# Altium PCB nexusqfp.PcbDoc (part 1 of 2)
Units mm, origin at the board's own origin, x right, y up, seen from the top; angles counter-clockwise.
Board outline 100 x 100 mm, 2 copper layers (Top Layer, Bottom Layer); 128 components, 155 nets, 699 pads, 158 vias.
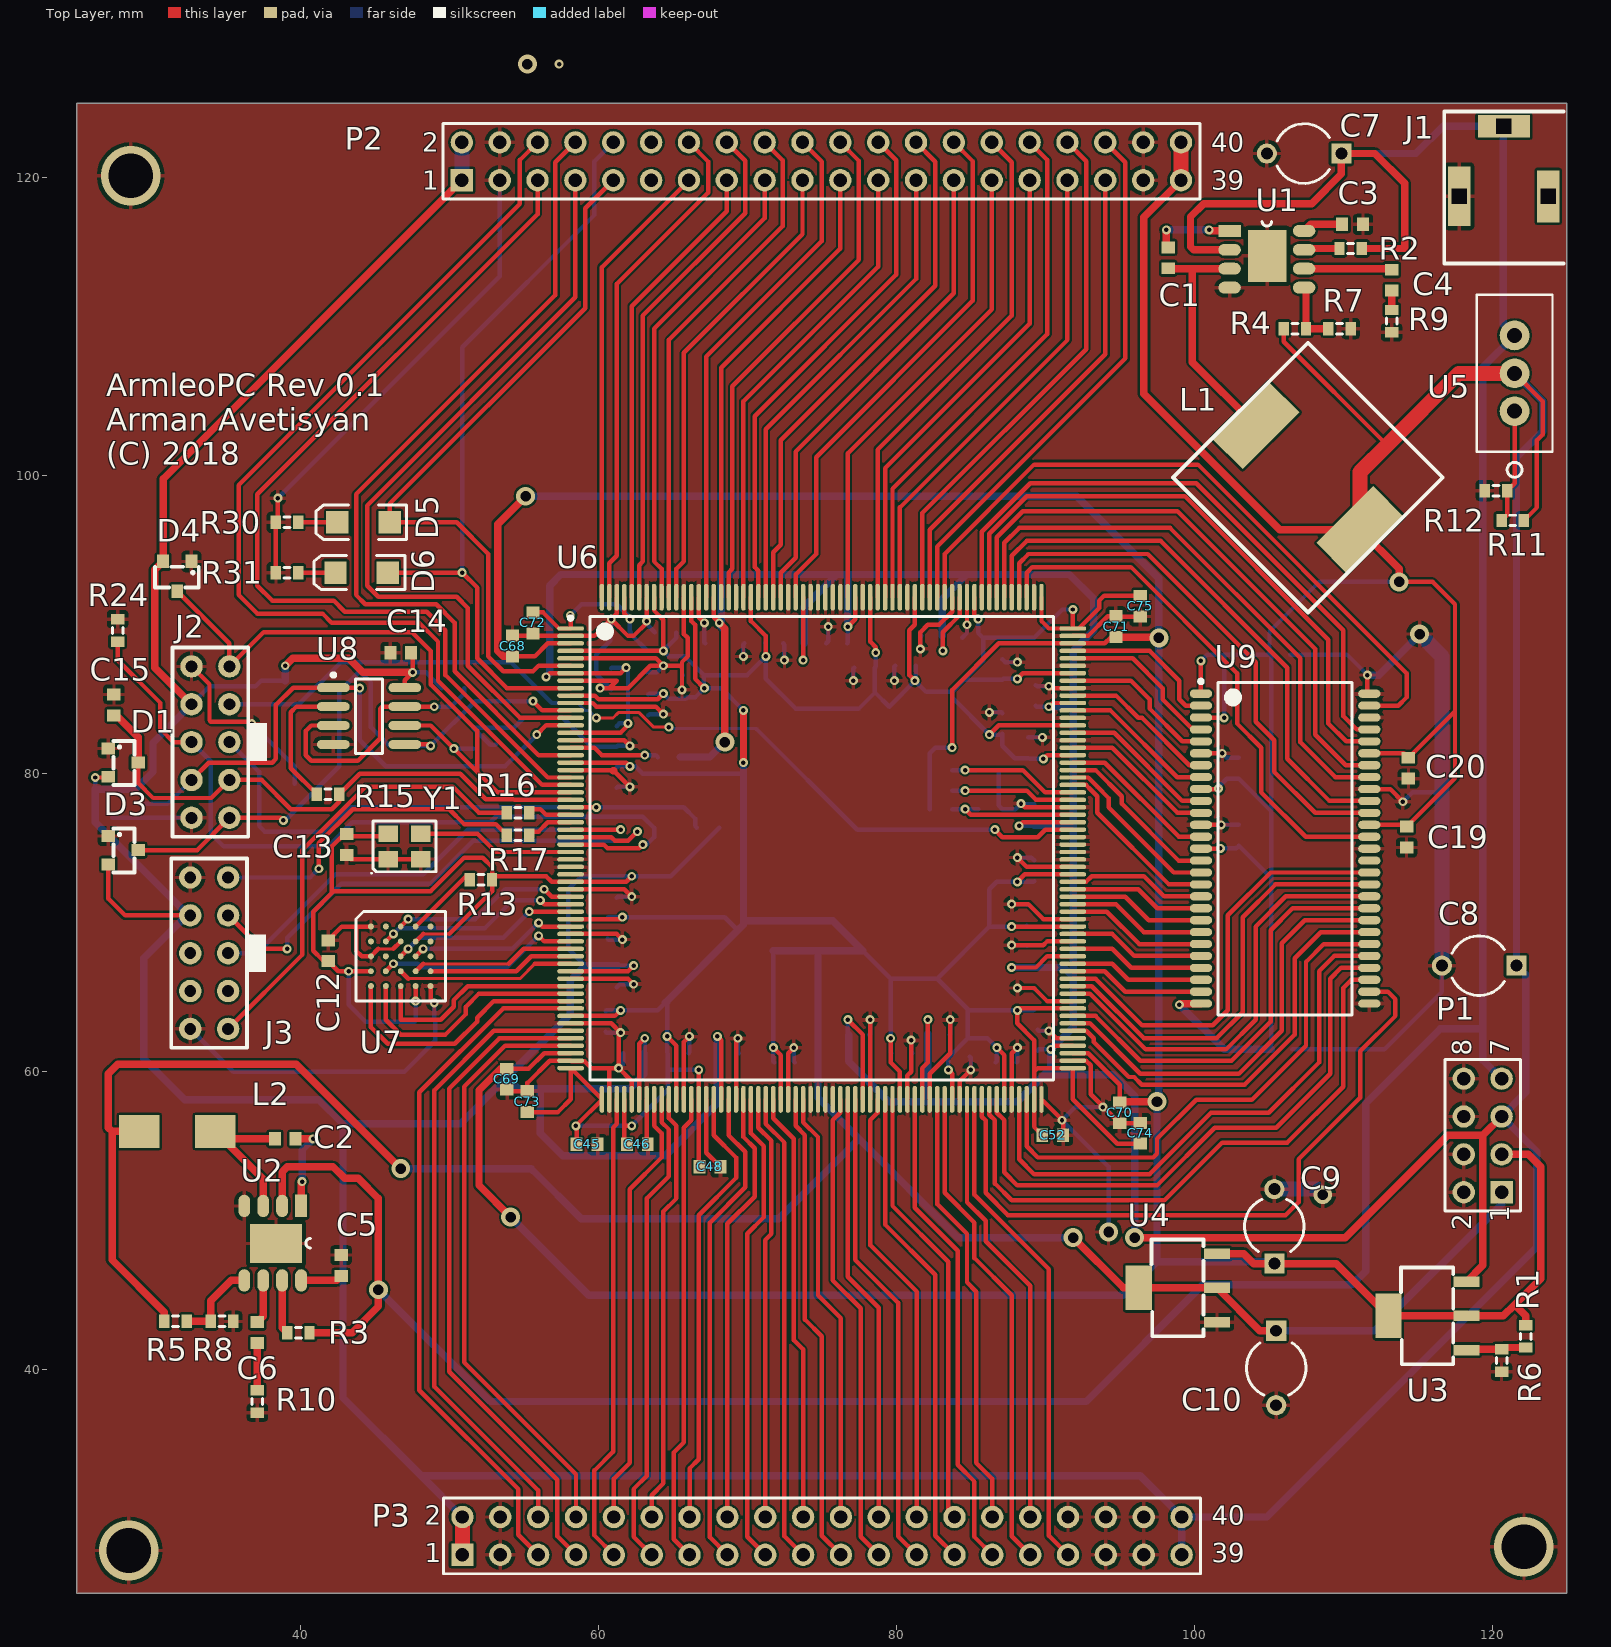
[diagram p0: Top Layer view]
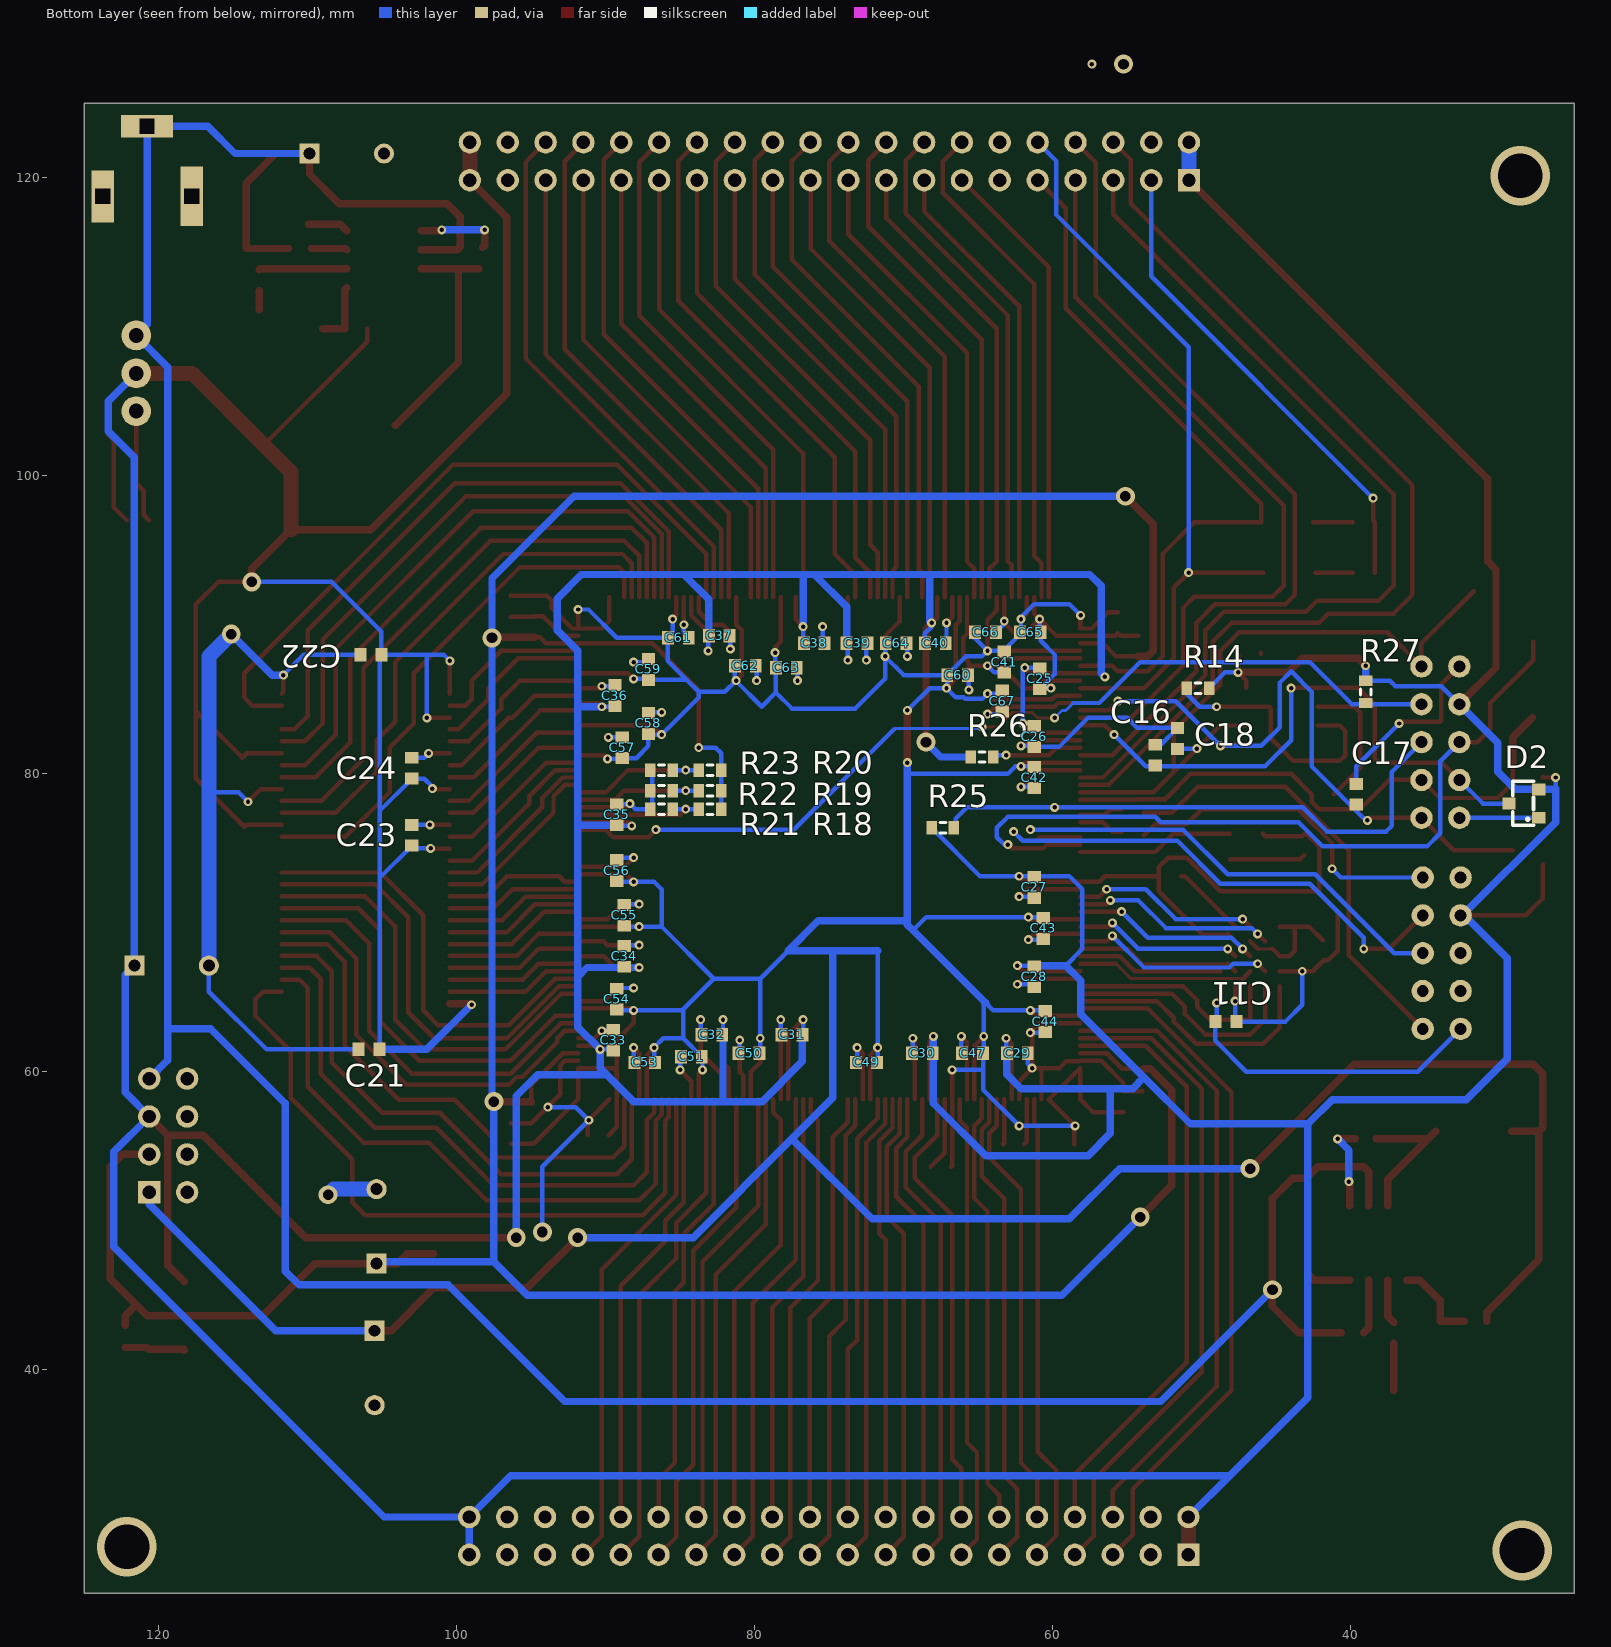
[diagram p1: Bottom Layer view, seen from below]

## Layer stack, top to bottom
Top Solder: solder mask 0.0102, Solder Resist, Dk 3.5
Top Layer: signal copper 0.0356
Dielectric 1: dielectric 0.32, FR-4, Dk 4.8
Bottom Layer: signal copper 0.0356
Bottom Solder: solder mask 0.0102, Solder Resist, Dk 3.5

## Board outline
25,25 125,25 125,125 25,125

## Design rules (kind name [scope] priority, off if disabled: settings)
Clearance [All] p1: gap=0.152 ignorepadtopadclearanceinfootprint=FALSE
HoleSize [All] p1: absolutevalues=TRUE maxlimit=6.3 minlimit=0.3 maxpercent=80.000 minpercent=20.000
MinimumSolderMaskSliver [All] p1: minsoldermaskwidth=0.152
PolygonConnect [All] p1: connectstyle=Relief reliefconductorwidth=0.254 reliefentries=4 polygonreliefangle="90 Angle" airgapwidth=0.254
RoomDefinition nexusqfp [InComponentClass('nexusqfp')] p1: confinementstyle=ConfineIn formatcopy=TRUE lockcomponents=FALSE outline 12.75,19.5 134.5,19.5 134.5,131 12.75,131
RoutingVias [All] p1: holewidth=0.3 width=0.6 viastyle="Through Hole" minholewidth=0.3 minwidth=0.6 maxholewidth=6.3 maxwidth=6.3
SolderMaskExpansion [All] p1: expansion=0.51
Width [All] p1: maxlimit=6.3 minlimit=0.15 preferedwidth=0.3
28 further rules are at their usual default settings.

## Components (designator, comment, footprint, x,y, rotation, side; value= is the part's Value field where it differs from the comment)
C1 "Cap Semi" 1608[0603] 98.25,114.625 r90 top value=10nF
C2 "Cap Semi" 1608[0603] 39,55.5 r0 top value=10nF
C3 "Cap Semi" 1608[0603] 110.625,116.875 r180 top value=100pF
C4 "Cap Semi" 1608[0603] 113.25,113.125 r90 top value=6.8nF
C5 "Cap Semi" 1608[0603] 42.75,47 r270 top value=100pF
C6 "Cap Semi" 1608[0603] 37.125,42.5 r90 top value=6.8nF
C7 "Cap2" CAPR5-4X5 107.375,121.625 r180 top value=47uF
C8 "Cap2" CAPR5-4X5 119.125,67.125 r180 top value=47uF
C9 "Cap2" CAPR5-4X5 105.375,49.625 r90 top value=47uF
C10 "Cap2" CAPR5-4X5 105.5,40.125 r270 top value=47uF
C11 "Cap Semi" 1608[0603] 48.375,63.375 r180 bottom value=100pF
C12 "Cap Semi" 1608[0603] 41.875,68.125 r270 top value=100pF
C13 "Cap Semi" 1608[0603] 43.125,75.25 r90 top value=100pF
C14 "Cap Semi" 1608[0603] 46.75,88.125 r0 top value=100pF
C15 "" 1608[0603] 27.5,84.625 r90 top value=10pF
C16 "" 1608[0603] 53.125,81.25 r90 bottom value=10pF
C17 "" 1608[0603] 39.625,78.625 r90 bottom value=10pF
C18 "" 1608[0603] 51.625,82.375 r90 bottom value=10pF
C19 "Cap Semi" 1608[0603] 114.25,75.75 r90 top value=100pF
C20 "Cap Semi" 1608[0603] 114.375,80.375 r90 top value=100pF
C21 "Cap Semi" 1608[0603] 105.875,61.5 r180 bottom value=100pF
C22 "Cap Semi" 1608[0603] 105.75,88 r180 bottom value=100pF
C23 "Cap Semi" 1608[0603] 103,75.875 r270 bottom value=100pF
C24 "Cap Semi" 1608[0603] 103,80.375 r270 bottom value=100pF
C25 "Cap Semi" 1608[0603] 60.875,86.375 r90 bottom value=100pF
C26 "Cap Semi" 1608[0603] 61.25,82.5 r90 bottom value=100pF
C27 "Cap Semi" 1608[0603] 61.25,72.375 r90 bottom value=100pF
C28 "Cap Semi" 1608[0603] 61.25,66.375 r90 bottom value=100pF
C29 "Cap Semi" 1608[0603] 62.375,61.25 r0 bottom value=100pF
C30 "Cap Semi" 1608[0603] 68.75,61.25 r180 bottom value=100pF
C31 "Cap Semi" 1608[0603] 77.5,62.5 r180 bottom value=100pF
C32 "Cap Semi" 1608[0603] 82.875,62.5 r180 bottom value=100pF
C33 "Cap Semi" 1608[0603] 89.5,62.125 r270 bottom value=100pF
C34 "Cap Semi" 1608[0603] 88.75,67.75 r270 bottom value=100pF
C35 "Cap Semi" 1608[0603] 89.25,77.25 r270 bottom value=100pF
C36 "Cap Semi" 1608[0603] 89.375,85.25 r270 bottom value=100pF
C37 "Cap Semi" 1608[0603] 82.375,89.25 r0 bottom value=100pF
C38 "Cap Semi" 1608[0603] 76,88.75 r0 bottom value=100pF
C39 "Cap Semi" 1608[0603] 73.125,88.75 r0 bottom value=100pF
C40 "Cap Semi" 1608[0603] 67.875,88.75 r0 bottom value=100pF
C41 "Cap Semi" 1608[0603] 63.25,87.5 r90 bottom value=100pF
C42 "Cap Semi" 1608[0603] 61.25,79.75 r90 bottom value=100pF
C43 "Cap Semi" 1608[0603] 60.625,69.625 r90 bottom value=100pF
C44 "Cap Semi" 1608[0603] 60.5,63.375 r90 bottom value=100pF
C45 "Cap Semi" 1608[0603] 59.25,55.125 r180 top value=100pF
C46 "Cap Semi" 1608[0603] 62.625,55.125 r180 top value=100pF
C47 "Cap Semi" 1608[0603] 65.375,61.25 r180 bottom value=100pF
C48 "Cap Semi" 1608[0603] 67.5,53.625 r180 top value=100pF
C49 "Cap Semi" 1608[0603] 72.5,60.625 r180 bottom value=100pF
C50 "Cap Semi" 1608[0603] 80.375,61.25 r180 bottom value=100pF
C51 "Cap Semi" 1608[0603] 84.25,61 r180 bottom value=100pF
C52 "Cap Semi" 1608[0603] 90.5,55.75 r180 top value=100pF
C53 "Cap Semi" 1608[0603] 87.375,60.625 r180 bottom value=100pF
C54 "Cap Semi" 1608[0603] 89.25,64.875 r270 bottom value=100pF
C55 "Cap Semi" 1608[0603] 88.75,70.5 r270 bottom value=100pF
C56 "Cap Semi" 1608[0603] 89.25,73.5 r270 bottom value=100pF
C57 "Cap Semi" 1608[0603] 88.875,81.75 r270 bottom value=100pF
C58 "Cap Semi" 1608[0603] 87.125,83.375 r270 bottom value=100pF
C59 "Cap Semi" 1608[0603] 87.125,87 r270 bottom value=100pF
C60 "Cap Semi" 1608[0603] 66.375,86.625 r0 bottom value=100pF
C61 "Cap Semi" 1608[0603] 85.125,89.125 r0 bottom value=100pF
C62 "Cap Semi" 1608[0603] 80.625,87.25 r0 bottom value=100pF
C63 "Cap Semi" 1608[0603] 77.875,87.125 r0 bottom value=100pF
C64 "Cap Semi" 1608[0603] 70.5,88.75 r0 bottom value=100pF
C65 "Cap Semi" 1608[0603] 61.5,89.5 r0 bottom value=100pF
C66 "Cap Semi" 1608[0603] 64.5,89.5 r0 bottom value=100pF
C67 "Cap Semi" 1608[0603] 63.375,84.875 r90 bottom value=100pF
C68 "Cap Semi" 1608[0603] 54.25,88.575 r270 top value=100pF
C69 "Cap Semi" 1608[0603] 53.875,59.5 r90 top value=100pF
C70 "Cap Semi" 1608[0603] 95,57.25 r90 top value=100pF
C71 "Cap Semi" 1608[0603] 94.75,89.875 r270 top value=100pF
C72 "Cap Semi" 1608[0603] 55.625,90.125 r90 top value=100pF
C73 "Cap Semi" 1608[0603] 55.25,58 r270 top value=100pF
C74 "Cap Semi" 1608[0603] 96.375,55.875 r270 top value=100pF
C75 "Cap Semi" 1608[0603] 96.375,91.25 r90 top value=100pF
D1 "Double Diode" SOT-23 29.125,80.75 r270 top
D2 "Double Diode" SOT-23 29.375,78 r90 bottom
D3 "Double Diode" SOT-23 29.125,74.875 r270 top
D4 "Double Diode" SOT-23 31.75,92.25 r180 top
D5 "LED2" 3.2X1.6X1.1 44.25,96.875 r180 top
D6 "LED2" 3.2X1.6X1.1 44.125,93.501 r180 top
J1 "PowerJack" PJ-002A 117.781,118.75 r0 top
J2 "2X5 2.54mm Conn with polarity" "2X5 with polarity" 32.71,77.045 r0 top
J3 "2X5 2.54mm Conn with polarity" "2X5 with polarity" 32.625,62.88 r0 top
L1 "Inductor" "74477110 Inductor" 107.625,99.875 r45 top value=10uH
L2 "Inductor" 744311330 31.75,56 r0 top value=10uH
P1 "Header 4X2" HDR2X4 120.625,51.92 r90 top
P2 "Header 20X2" HDR2X20 50.85,119.835 r0 top
P3 "Header 20X2" HDR2X20 50.89,27.585 r0 top
R1 "Res3" J1-0603 122.25,42.25 r90 top value=1K
R2 "Res3" J1-0603 110.5,115.25 r0 top value=100K
R3 "Res3" J1-0603 39.875,42.5 r0 top value=100K
R4 "Res3" J1-0603 106.75,109.875 r0 top value=26.1K
R5 "Res3" J1-0603 31.625,43.25 r0 top value=3K
R6 "Res3" J1-0603 120.625,40.625 r90 top value=1K
R7 "Res3" J1-0603 109.75,109.875 r180 top value=10K
R8 "Res3" J1-0603 34.75,43.25 r180 top value=10K
R9 "Res3" J1-0603 113.25,110.375 r90 top value=6.8K
R10 "Res3" J1-0603 37.125,37.875 r90 top value=3.24K
R11 "Res3" J1-0603 121.375,97 r0 top value=1640
R12 "Res3" J1-0603 120.25,99 r0 top value=1K
R13 "Res3" J1-0603 52.125,72.875 r0 top value=10K
R14 "Res3" J1-0603 50.25,85.75 r180 bottom value=1K
R15 "Res3" J1-0603 41.875,78.625 r0 top value=27
R16 "Res3" J1-0603 54.625,77.375 r0 top value=27
R17 "Res3" J1-0603 54.625,75.875 r0 top value=27
R18 "Res3" J1-0603 83,77.625 r180 bottom value=0
R19 "Res3" J1-0603 83,78.875 r180 bottom value=0
R20 "Res3" J1-0603 83,80.25 r180 bottom value=0
R21 "Res3" J1-0603 86.25,77.625 r180 bottom value=0
R22 "Res3" J1-0603 86.25,78.875 r180 bottom value=0
R23 "Res3" J1-0603 86.25,80.25 r180 bottom value=0
R24 "Res3" J1-0603 27.75,89.625 r90 top value=10K
R25 "Res3" J1-0603 67.375,76.375 r180 bottom value=10K
R26 "Res3" J1-0603 64.75,81.125 r180 bottom value=10K
R27 "Res3" J1-0603 39,85.5 r270 bottom value=10K
R30 "Res3" J1-0603 39.125,96.875 r0 top value=500
R31 "Res3" J1-0603 39.125,93.5 r0 top value=500
U1 "AP6503" SO-8EP 102.375,116.435 r0 top
U2 "AP6503" SO-8EP 40.06,51 r270 top
U3 "AMS1117-ADJ" SOT-223 115.625,43.625 r90 top
U4 "AMS1117-1.2V" SOT-223 98.875,45.5 r90 top
U5 "LM317TG" TO-220AB 121.5,109.415 r90 top value=Value
U6 "EP3C40Q240C8N" PQFP240_N 75,75 r0 top
U7 "HyperRAM" "BGA5x5 1mm" 46.75,67.75 r0 top
U8 "M25P16-VMN3PB" MICT-MN-8_N 44.625,83.875 r0 top
U9 "MT48LC16M16A2P-6A" MICT-P-54_N 106.1,74.975 r0 top
Y1 "Abracon XO ASE" "ABRACON ASE" 47,75.125 r0 top

## Footprints (in the part's own frame and the unit in brackets; to place one, negate y for a bottom-side part, rotate by r counter-clockwise, add the part's x,y. Pads: shape width x height; smd on the part's side, far side on the other; paste and mask are expansions set on the pad)
"2X5 with polarity" [mm]
  round 1.5 hole 0.8: 1(2.54,10.16) 2(0,10.16) 3(2.54,7.62) 4(0,7.62) 5(2.54,5.08) 6(0,5.08) 7(2.54,2.54) 8(0,2.54) 9(2.54,0) 10(0,0)
  silkscreen extent -1.27,-1.27 5.08,11.43
3.2X1.6X1.1 [mm] "SMT LED; 2 Flat Leads"
  rect 1.5x1.5 smd: 1(-1.75,0) 2(1.75,0)
  silkscreen extent -2.9,-1.15 3.2,1.15
1608[0603] [mm] "Chip Capacitor, Body 1.6x0.8mm, IPC High Density"
  rect 0.8x0.9 smd: 1(-0.7,0) 2(0.7,0)
  body extent -0.87,-0.48 0.87,0.48, height 1.3
"74477110 Inductor" [mm]
  rect 5.4x2.9 smd: 1(0,4.95) 2(0,-4.95)
  silkscreen extent -6.4,-6.4 6.4,6.4
744311330 [mm]
  rect 2.7x2.2 smd: 1(2.55,0) 2(-2.55,0)
"ABRACON ASE" [mm] "Crystal, 4-Leads, Body 2.50x3.20mm, Pitch 2.20mm, IPC Medium Density"
  rect 1.3x1.1 smd: 1(-1.1,-0.85) 2(1.1,-0.85) 3(1.1,0.85) 4(-1.1,0.85)
  silkscreen extent -2.25,-1.85 2.1,1.7, body extent -1.62,-1.27 1.63,1.28, height 1.2
"BGA5x5 1mm" [mm]
  round 0.4 smd: A1(-2,2) A2(-1,2) A3(0,2) A4(1,2) A5(2,2) B1(-2,1) B2(-1,1) B3(0,1) B4(1,1) B5(2,1) C1(-2,0) C2(-1,0) C3(0,0) C4(1,0) C5(2,0) D1(-2,-1) D2(-1,-1) D3(0,-1) D4(1,-1) D5(2,-1) E1(-2,-2) E2(-1,-2) E3(0,-2) E4(1,-2) E5(2,-2)
  silkscreen extent -3,-3 3,3
CAPR5-4X5 [mm] "Capacitor; 2 Leads"
  rect 1.35x1.35 hole 0.8: 1(-2.5,0)
  round 1.35 hole 0.8: 2(2.5,0)
  silkscreen extent -1.69,-2 1.82,2
HDR2X4 [mm] "Connector; Header; 4x2 Position"
  rect 1.5x1.5 hole 0.9: 1(0,0)
  round 1.5 hole 0.9: 2(0,2.54) 3(2.54,0) 4(2.54,2.54) 5(5.08,0) 6(5.08,2.54) 7(7.62,0) 8(7.62,2.54)
  silkscreen extent -1.27,-1.27 8.89,3.81
HDR2X20 [mm] "Connector; Header; 20x2 Position"
  rect 1.5x1.5 hole 0.9: 1(0,0)
  round 1.5 hole 0.9: 2(0,2.54) 3(2.54,0) 4(2.54,2.54) 5(5.08,0) 6(5.08,2.54) 7(7.62,0) 8(7.62,2.54) 9(10.16,0) 10(10.16,2.54) 11(12.7,0) 12(12.7,2.54) 13(15.24,0) 14(15.24,2.54) 15(17.78,0) 16(17.78,2.54) 17(20.32,0) 18(20.32,2.54) 19(22.86,0) 20(22.86,2.54) 21(25.4,0) 22(25.4,2.54) 23(27.94,0) 24(27.94,2.54) 25(30.48,0) 26(30.48,2.54) 27(33.02,0) 28(33.02,2.54) 29(35.56,0) 30(35.56,2.54) 31(38.1,0) 32(38.1,2.54) 33(40.64,0) 34(40.64,2.54) 35(43.18,0) 36(43.18,2.54) 37(45.72,0) 38(45.72,2.54) 39(48.26,0) 40(48.26,2.54)
  silkscreen extent -1.27,-1.27 49.53,3.81
J1-0603 [mm] "Chip Resistor, Body 1.6x0.8mm, IPC High Density"
  rect 0.7x0.9 smd: 1(-0.75,0) 2(0.75,0)
  silkscreen extent -0.2,-0.35 0.2,0.35, body extent -0.85,-0.48 0.85,0.48, height 0.9
MICT-MN-8_N [mm] "SOIC, 8-Leads, Body 5x4mm, Pitch 1.27mm, IPC Medium Density"
  oval 2.2x0.6 smd: 1(-2.4,1.905) 2(-2.4,0.635) 3(-2.4,-0.635) 4(-2.4,-1.905) 5(2.4,-1.905) 6(2.4,-0.635) 7(2.4,0.635) 8(2.4,1.905)
  silkscreen extent -2.52,-2.5 0.9,2.88, body extent -2,-2.5 2,2.5, height 0.1
MICT-P-54_N [mm] "SOP, 54-Leads, Body 22.3x10.2mm, Pitch 0.8mm, IPC Medium Density"
  oval 1.5x0.55 smd: 1(-5.65,10.4) 2(-5.65,9.6) 3(-5.65,8.8) 4(-5.65,8) 5(-5.65,7.2) 6(-5.65,6.4) 7(-5.65,5.6) 8(-5.65,4.8) 9(-5.65,4) 10(-5.65,3.2) 11(-5.65,2.4) 12(-5.65,1.6) 13(-5.65,0.8) 14(-5.65,0) 15(-5.65,-0.8) 16(-5.65,-1.6) 17(-5.65,-2.4) 18(-5.65,-3.2) 19(-5.65,-4) 20(-5.65,-4.8) 21(-5.65,-5.6) 22(-5.65,-6.4) 23(-5.65,-7.2) 24(-5.65,-8) 25(-5.65,-8.8) 26(-5.65,-9.6) 27(-5.65,-10.4) 28(5.65,-10.4) 29(5.65,-9.6) 30(5.65,-8.8) 31(5.65,-8) 32(5.65,-7.2) 33(5.65,-6.4) 34(5.65,-5.6) 35(5.65,-4.8) 36(5.65,-4) 37(5.65,-3.2) 38(5.65,-2.4) 39(5.65,-1.6) 40(5.65,-0.8) 41(5.65,0) 42(5.65,0.8) 43(5.65,1.6) 44(5.65,2.4) 45(5.65,3.2) 46(5.65,4) 47(5.65,4.8) 48(5.65,5.6) 49(5.65,6.4) 50(5.65,7.2) 51(5.65,8) 52(5.65,8.8) 53(5.65,9.6) 54(5.65,10.4)
  silkscreen extent -5.77,-11.15 4.5,11.35, body extent -5.1,-11.15 5.1,11.15, height 1.2
PJ-002A [mm]
  rect 1.5x4 hole 1 square: 1(0,0)
  rect 1.5x3.5 hole 1 square: 2(5.969,0)
  rect 3.5x1.5 hole 1 square: 3(3,4.7)
  silkscreen extent -1,-4.5 7,5.7
PQFP240_N [mm] "Shrink QFP, 240-Leads, Body 32x32mm, Pitch 0.5mm, IPC Medium Density"
  oval 1.8x0.3 smd: 1(-16.85,14.75) 2(-16.85,14.25) 3(-16.85,13.75) 4(-16.85,13.25) 5(-16.85,12.75) 6(-16.85,12.25) 7(-16.85,11.75) 8(-16.85,11.25) 9(-16.85,10.75) 10(-16.85,10.25) 11(-16.85,9.75) 12(-16.85,9.25) 13(-16.85,8.75) 14(-16.85,8.25) 15(-16.85,7.75) 16(-16.85,7.25) 17(-16.85,6.75) 18(-16.85,6.25) 19(-16.85,5.75) 20(-16.85,5.25) 21(-16.85,4.75) 22(-16.85,4.25) 23(-16.85,3.75) 24(-16.85,3.25) 25(-16.85,2.75) 26(-16.85,2.25) 27(-16.85,1.75) 28(-16.85,1.25) 29(-16.85,0.75) 30(-16.85,0.25) 31(-16.85,-0.25) 32(-16.85,-0.75) 33(-16.85,-1.25) 34(-16.85,-1.75) 35(-16.85,-2.25) 36(-16.85,-2.75) 37(-16.85,-3.25) 38(-16.85,-3.75) 39(-16.85,-4.25) 40(-16.85,-4.75) 41(-16.85,-5.25) 42(-16.85,-5.75) 43(-16.85,-6.25) 44(-16.85,-6.75) 45(-16.85,-7.25) 46(-16.85,-7.75) 47(-16.85,-8.25) 48(-16.85,-8.75) 49(-16.85,-9.25) 50(-16.85,-9.75) 51(-16.85,-10.25) 52(-16.85,-10.75) 53(-16.85,-11.25) 54(-16.85,-11.75) 55(-16.85,-12.25) 56(-16.85,-12.75) 57(-16.85,-13.25) 58(-16.85,-13.75) 59(-16.85,-14.25) 60(-16.85,-14.75) 121(16.85,-14.75) 122(16.85,-14.25) 123(16.85,-13.75) 124(16.85,-13.25) 125(16.85,-12.75) 126(16.85,-12.25) 127(16.85,-11.75) 128(16.85,-11.25) 129(16.85,-10.75) 130(16.85,-10.25) 131(16.85,-9.75) 132(16.85,-9.25) 133(16.85,-8.75) 134(16.85,-8.25) 135(16.85,-7.75) 136(16.85,-7.25) 137(16.85,-6.75) 138(16.85,-6.25) 139(16.85,-5.75) 140(16.85,-5.25) 141(16.85,-4.75) 142(16.85,-4.25) 143(16.85,-3.75) 144(16.85,-3.25) 145(16.85,-2.75) 146(16.85,-2.25) 147(16.85,-1.75) 148(16.85,-1.25) 149(16.85,-0.75) 150(16.85,-0.25) 151(16.85,0.25) 152(16.85,0.75) 153(16.85,1.25) 154(16.85,1.75) 155(16.85,2.25) 156(16.85,2.75) 157(16.85,3.25) 158(16.85,3.75) 159(16.85,4.25) 160(16.85,4.75) 161(16.85,5.25) 162(16.85,5.75) 163(16.85,6.25) 164(16.85,6.75) 165(16.85,7.25) 166(16.85,7.75) 167(16.85,8.25) 168(16.85,8.75) 169(16.85,9.25) 170(16.85,9.75) 171(16.85,10.25) 172(16.85,10.75) 173(16.85,11.25) 174(16.85,11.75) 175(16.85,12.25) 176(16.85,12.75) 177(16.85,13.25) 178(16.85,13.75) 179(16.85,14.25) 180(16.85,14.75)
  oval 0.3x1.8 smd: 61(-14.75,-16.85) 62(-14.25,-16.85) 63(-13.75,-16.85) 64(-13.25,-16.85) 65(-12.75,-16.85) 66(-12.25,-16.85) 67(-11.75,-16.85) 68(-11.25,-16.85) 69(-10.75,-16.85) 70(-10.25,-16.85) 71(-9.75,-16.85) 72(-9.25,-16.85) 73(-8.75,-16.85) 74(-8.25,-16.85) 75(-7.75,-16.85) 76(-7.25,-16.85) 77(-6.75,-16.85) 78(-6.25,-16.85) 79(-5.75,-16.85) 80(-5.25,-16.85) 81(-4.75,-16.85) 82(-4.25,-16.85) 83(-3.75,-16.85) 84(-3.25,-16.85) 85(-2.75,-16.85) 86(-2.25,-16.85) 87(-1.75,-16.85) 88(-1.25,-16.85) 89(-0.75,-16.85) 90(-0.25,-16.85) 91(0.25,-16.85) 92(0.75,-16.85) 93(1.25,-16.85) 94(1.75,-16.85) 95(2.25,-16.85) 96(2.75,-16.85) 97(3.25,-16.85) 98(3.75,-16.85) 99(4.25,-16.85) 100(4.75,-16.85) 101(5.25,-16.85) 102(5.75,-16.85) 103(6.25,-16.85) 104(6.75,-16.85) 105(7.25,-16.85) 106(7.75,-16.85) 107(8.25,-16.85) 108(8.75,-16.85) 109(9.25,-16.85) 110(9.75,-16.85) 111(10.25,-16.85) 112(10.75,-16.85) 113(11.25,-16.85) 114(11.75,-16.85) 115(12.25,-16.85) 116(12.75,-16.85) 117(13.25,-16.85) 118(13.75,-16.85) 119(14.25,-16.85) 120(14.75,-16.85) 181(14.75,16.85) 182(14.25,16.85) 183(13.75,16.85) 184(13.25,16.85) 185(12.75,16.85) 186(12.25,16.85) 187(11.75,16.85) 188(11.25,16.85) 189(10.75,16.85) 190(10.25,16.85) 191(9.75,16.85) 192(9.25,16.85) 193(8.75,16.85) 194(8.25,16.85) 195(7.75,16.85) 196(7.25,16.85) 197(6.75,16.85) 198(6.25,16.85) 199(5.75,16.85) 200(5.25,16.85) 201(4.75,16.85) 202(4.25,16.85) 203(3.75,16.85) 204(3.25,16.85) 205(2.75,16.85) 206(2.25,16.85) 207(1.75,16.85) 208(1.25,16.85) 209(0.75,16.85) 210(0.25,16.85) 211(-0.25,16.85) 212(-0.75,16.85) 213(-1.25,16.85) 214(-1.75,16.85) 215(-2.25,16.85) 216(-2.75,16.85) 217(-3.25,16.85) 218(-3.75,16.85) 219(-4.25,16.85) 220(-4.75,16.85) 221(-5.25,16.85) 222(-5.75,16.85) 223(-6.25,16.85) 224(-6.75,16.85) 225(-7.25,16.85) 226(-7.75,16.85) 227(-8.25,16.85) 228(-8.75,16.85) 229(-9.25,16.85) 230(-9.75,16.85) 231(-10.25,16.85) 232(-10.75,16.85) 233(-11.25,16.85) 234(-11.75,16.85) 235(-12.25,16.85) 236(-12.75,16.85) 237(-13.25,16.85) 238(-13.75,16.85) 239(-14.25,16.85) 240(-14.75,16.85)
  silkscreen extent -16.97,-15.55 15.55,15.57, body extent -16,-16 16,16, height 4.1
SO-8EP [mm]
  rect 1.5x0.8 smd: 1(0,0)
  oval 1.5x0.8 smd: 2(0,-1.27) 3(0,-2.54) 4(0,-3.81) 5(5,-3.81) 6(5,-2.54) 7(5,-1.27) 8(5,0)
  rect 2.6x3.5 smd: EP(2.52,-1.68)
  silkscreen extent 2.18,0.32 2.82,0.64
SOT-23 [mm]
  rect 0.8x0.9 smd: 1(-0.95,-2) 2(0.95,-2) 3(0,0)
  silkscreen extent -1.45,-1.65 1.5,-0.25
SOT-223 [mm]
  rect 0.7x1.75 smd: 1(-2.3,-2.65) 2(0,-2.65) 3(2.3,-2.65)
  rect 3x1.75 smd: 2(0,2.6)
  silkscreen extent -3.25,-1.75 3.25,1.75
TO-220AB [mm]
  round 2 hole 1 paste+0 mask+0: 1(-5.08,0) 2(-2.54,0) 3(0,0)
  silkscreen extent -9.52,-2.54 2.73,2.54, body extent 0,0 0.25,0.25, height 0.25

## Part data
C1 C2 C3 C4 C5 C6 C11 C12 C13 C14 C19 C20 C21 C22 C23 C24 C25 C26 C27 C28 C29 C30 C31 C32 C33 C34 C35 C36 C37 C38 C39 C40 C41 C42 C43 C44 C45 C46 C47 C48 C49 C50 C51 C52 C53 C54 C55 C56 C57 C58 C59 C60 C61 C62 C63 C64 C65 C66 C67 C68 C69 C70 C71 C72 C73 C74 C75: "Capacitor (Semiconductor SIM Model)", LatestRevisionDate=29-May-2009, LatestRevisionNote="IPC-7351 Footprint Added.", PackageDescription="Chip Capacitor", PackageReference=C1206, Published=8-Jun-2000, Publisher="Altium Limited"
C7 C8 C9 C10: "Capacitor", PackageDescription="Capacitor; 2 Leads", PackageReference=CAPR5-4X5, Published=23-Sep-2002, Publisher="Altium Limited"
C15 C16 C17 C18: library part "Cap Semi", "Capacitor (Semiconductor SIM Model)", LatestRevisionDate=29-May-2009, LatestRevisionNote="IPC-7351 Footprint Added.", PackageDescription="Chip Capacitor", PackageReference=C1206, Published=8-Jun-2000, Publisher="Altium Limited"
D1 D2 D3 D4: library part BAT54S
D5 D6: "Typical RED, GREEN, YELLOW, AMBER GaAs LED", LatestRevisionDate=17-Jul-2002, LatestRevisionNote="Re-released for DXP Platform.", PackageDescription="SM LED; 2 Flat Leads", PackageReference=3.2X1.6X1.1, PackageVersion=Feb-2002, Published=8-Jun-2000, Publisher="Altium Limited"
P1: "Header, 4-Pin, Dual row", LatestRevisionDate=17-Jul-2002, LatestRevisionNote="Re-released for DXP Platform.", Publisher="Altium Limited"
P2 P3: "Header, 20-Pin, Dual row", LatestRevisionDate=17-Jul-2002, LatestRevisionNote="Re-released for DXP Platform.", Publisher="Altium Limited"
R1 R2 R3 R4 R5 R6 R7 R8 R9 R10 R11 R12 R13 R14 R15 R16 R17 R18 R19 R20 R21 R22 R23 R24 R25 R26 R27 R30 R31: "Resistor", LatestRevisionDate=29-May-2009, LatestRevisionNote="IPC-7351 Footprint Added.", PackageDescription="Chip Resistor", PackageReference=J1-0603, Published=8-Jun-2000, Publisher="Altium Limited"
U5: "Imported", Built_By=EMA_UL_Team, C="Copyright (C) 2015 Accelerated Designs. All rights reserved", Manufacturer_Part_Number=LM317TG, RefDes=RefDes, Type=Type, Vendor="ON Semiconductor"
U6: "Cyclone III Family FPGA, 128 I/O Pins, 4 PLLs, 240-Pin PQFP, Speed Grade 8, Commercial Grade, Pb-Free", Supplier Part Number 1=544-2551-ND, Code_JEDEC=MS-029-GA, ComponentLink1Description="Manufacturer Link", ComponentLink1URL=http://www.altera.com/, ComponentLink2Description="Handbook (7.86MB)", ComponentLink2URL=http://www.altera.com/literature/hb/cyc3/cyclone3_handbook.pdf, ComponentLink3Description="Packaging Specification", ComponentLink3URL=http://www.altera.com/literature/ds/dspkg.pdf, DatasheetVersion="ver2.0, May-2008", PackageDescription="240-Pin Plastic Quad Flat Pack (PQFP240) - Wire Bond", PackageReference=PQFP240, PackageVersion="ver15.4, Dec-2008", Published=26-Feb-2007, Publisher="Altium Limited", Supplier 1=Digi-Key, Supplier 2=Farnell, Supplier Part Number 2=1635069
U8: "16 Mb (x1) Automotive Serial NOR Flash Memory, 75 MHz, 2.7 to 3.6 V, 8-pin SO8 Narrow (MN), Tube", Manufacturer=Micron, Package="SO8 Narrow", Voltage=2.7V-3.6V, Applications=Automotive, ComponentLink1Description="Manufacturer URL", ComponentLink1URL=http://www.micron.com/, ComponentLink2Description=Datasheet, ComponentLink2URL=http://www.micron.com/~/media/Documents/Products/Data%20Sheet/NOR%20Flash/Serial%20NOR/M25P/M25P16.pdf, ComponentLink3Description="Package Specification", ComponentLink3URL=http://www.micron.com/~/media/Documents/Products/Data%20Sheet/NOR%20Flash/Serial%20NOR/M25P/M25P05A.pdf, DatasheetVersion="Rev. Y", Density=16Mb, Mounting Technology="Surface Mount", PackageDescription="8-Pin SO Narrow, 3.9 X 4.9 mm, Pitch 1.27 mm", PackageReference=MICT-MN-8, PackageVersion="Rev 11", Part Family=M25P, PartNumber=M25P16-VMN3PB, Part Status=Production, RoHS=Yes, Speed="75 MHz", Type="Data Storage", Width=x1
U9: "256Mb PC133 SDR SDRAM, 16Mb x 16, 6ns, 3.3V, 0 to 70 degC, 54-Pin TSOP, Pb-Free", Manufacturer=Micron, Op. Temp.="0C to +70C", Voltage=3.3V, CL="CL = 3", Clock Rate="167 MHz", ComponentLink1Description="Manufacturer URL", ComponentLink1URL=http://www.micron.com/, ComponentLink2Description=Datasheet, ComponentLink2URL=http://www.micron.com/~/media/Documents/Products/Data%20Sheet/DRAM/256Mb_sdr.pdf, ComponentLink3Description="Package Specification", ComponentLink3URL=http://www.micron.com/~/media/Documents/Products/Data%20Sheet/DRAM/128mb_x4x8x16_sdram.pdf, Cycle Time=6ns, Data Rate=PC133, DatasheetVersion=Rev.Q, Density=256Mb, Depth=16Mb, Mounting Technology="Surface Mount", PackageDescription="54-Pin Thin Small Outline Package, 10.16 x 22.22 mm, Pitch 0.8 mm", PackageReference=MICT-P-54, PackageVersion=Rev.Q, PartNumber=MT48LC16M16A2P-6A, RoHS=Yes, Width=x16
Y1: "SMD CMOS Crystal Oscillator"

## Via types
v1: diameter 0.6, hole 0.3, Top Layer to Bottom Layer, tented both sides, 141 vias
v2: diameter 1.27, hole 0.711, Top Layer to Bottom Layer, 14 vias
v3: diameter 4, hole 3, Top Layer to Bottom Layer, 3 vias

## Nets (pads, with @x,y where several pads share a name; then routed paths per layer and width w, separated by ;. In a path a pad name is that pad's centre, name@x,y a point inside that pad or via, vN(x,y) a via of type N, cw(c..) or ccw(c..) an arc to the next point about the centre after c; other vN are vias at no path point)
1.2V: C10.1 C41.2 C42.2 C43.2 C44.2 C45.2 C46.2 C47.2 C48.2 C49.2 C50.2 C51.2 C52.2 C53.2 C54.2 C55.2 C56.2 C57.2 C58.2 C59.2 C60.2 C61.2 C62.2 C63.2 C64.2 C65.2 C66.2 C67.2 C72.2 C73.2 C74.2 C75.2 L2.2 P1.1 R5.1 U4.2 U6.1 U6.4 U6.10 U6.19 U6.40 U6.53 U6.60 U6.61 U6.64 U6.71 U6.74 U6.85 U6.101 U6.108 U6.115 U6.119 U6.121 U6.129 U6.140 U6.147 U6.163 U6.167 U6.174 U6.180 U6.181 U6.190 U6.198 U6.204 U6.220 U6.228 U6.233 U6.237 | length 487.3
  Top Layer w0.3: C73.2@55.25,57.3 57.3,57.3 58.15,58.15 U6.60@58.15,60.25 U6.61@60.25,58.15 60.25,58.125 58.55,56.425 C45.2@58.55,55.125 ; C72.2@55.625,90.825 56.3,90.825 57.375,89.75 U6.1@58.15,89.75 58.15,90.6 v1(58.125,90.625) ; U6.53@58.15,63.75 61.125,63.75 v1(61.5,64.125) ; U6.40@58.15,70.25 61.5,70.25 v1(61.625,70.375) ; U6.19@58.15,80.75 61.875,80.75 v1(62.125,80.5) ; U6.10@58.15,85.25 59.774,85.25 60.024,85 64,85 v1(64.375,85.375) ; U6.4@58.15,88.25 v1(64.375,88.25) 64.375,90.336 63.75,90.961 U6.233@63.75,91.85 ; U6.64@61.75,58.15 61.75,56.375 ; U6.237@61.75,91.85 61.75,90.75 v1(62.125,90.375) ; C46.2@61.925,55.125 61.75,55.3 61.75,56.375 ; v1(62.25,56.375) 61.75,56.375 ; v1(64.625,62.375) 65.25,61.75 U6.71@65.25,58.15 ; U6.228@66.25,91.85 66.25,90.25 66.5,90 66.5,86.375 v1(67.125,85.75) ; v1(66.75,60.125) U6.74@66.75,58.15 66.75,53.675 C48.2@66.8,53.625 ; U6.220@70.25,91.85 70.25,90.25 71.25,89.25 v1(71.25,87.875) ; v1(71.75,61.625) 72.25,61.125 U6.85@72.25,58.15 ; U6.204@78.25,91.85 78.25,88.875 78.625,88.5 v1(78.625,88.125) ; v1(79.625,62.25) 79.625,60.625 80.25,60 U6.101@80.25,58.15 ; v1(81.25,86.25) 80.875,86.625 80.875,89.625 81.25,90 U6.198@81.25,91.85 ; v1(83.5,60.125) 83.75,59.875 U6.108@83.75,58.15 ; U6.190@85.25,91.85 85.25,90.625 v1(85.5,90.375) ; v1(86.25,82.625) 86.875,83.25 U6.167@91.85,83.25 ; v1(86.75,61.625) 87.25,61.125 U6.115@87.25,58.15 ; v1(87.75,69.75) U6.140@91.85,69.75 ; v1(88.125,72.75) 88.625,73.25 U6.147@91.85,73.25 ; v1(88.125,86.375) 88.5,86.75 U6.174@91.85,86.75 ; U6.181@89.75,91.85 89.75,90.25 90.25,89.75 U6.180@91.85,89.75 ; C52.2@89.8,55.75 89.25,56.3 U6.119@89.25,58.15 89.25,60 ; v1(89.875,81) 90.125,81.25 U6.163@91.85,81.25 ; U6.129@91.85,64.25 88.25,64.25 v1(88.125,64.125) 88.125,63.25 89.25,62.125 89.25,60 ; v1(91.85,91.025) U6.180@91.85,89.75 ; C74.2@96.375,55.175 94.825,55.175 91.85,58.15 U6.121@91.85,60.25 89.5,60.25 89.25,60 ; C75.2@96.375,91.95 93.95,91.95 93.625,91.625 93.625,91.125 92.25,89.75 U6.180@91.85,89.75
  Top Layer w0.5: L2.2@29.2,56 27.375,56 ; R5.1@30.875,43.25 30.875,43.875 27.375,47.375 27.375,56 ; v2(46.75,53.5) 39.75,60.5 27.75,60.5 27.125,59.875 27.125,56.25 27.375,56 ; v1(69.75,80.75) v1(69.75,84.25) ; v2(91.875,48.875) 95.25,45.5 U4.2@96.275,45.5 U4.2@101.525,45.5 104.4,42.625 C10.1@105.5,42.625
  Bottom Layer w0.3: 55.5,53.5 55.625,53.375 ; v1(58.125,90.625) 58.875,91.375 61.25,91.375 62.125,90.5 v1(62.125,90.375) 62.125,89.575 C65.2@62.2,89.5 62.2,89.35 63.3,88.25 v1(64.375,88.25) ; v1(58.5,56.375) v1(62.25,56.375) 64.675,58.8 64.675,60.025 ; C44.2@60.5,64.075 60.55,64.125 v1(61.5,64.125) 64,64.125 64.5,64.625 ; C43.2@60.625,70.325 60.675,70.375 v1(61.625,70.375) 68.5,70.375 69.375,69.5 ; C42.2@61.25,80.45 61.3,80.5 v1(62.125,80.5) 62.5,80.5 63,80 69.75,80 ; C67.2@63.375,85.325 63.425,85.375 v1(64.375,85.375) 64.727,85.023 65.874,85.023 65.976,85.125 66.5,85.125 v1(67.125,85.75) ; 64.625,64.75 v1(64.625,62.375) 64.625,61.3 C47.2@64.675,61.25 64.675,60.025 ; C66.2@65.25,89.45 65.25,89.125 v1(64.375,88.25) ; v1(66.75,60.125) 64.775,60.125 64.675,60.025 ; v1(69.75,84.25) 68.25,85.75 v1(67.125,85.75) ; C64.2@71.2,88.75 71.25,88.7 v1(71.25,87.875) ; 71.75,68.125 v1(71.75,61.625) 71.75,60.675 C49.2@71.8,60.625 ; 77.75,68.125 79.625,66.25 ; v1(78.625,88.125) 78.625,87.175 C63.2@78.575,87.125 78.575,85.45 ; C50.2@79.675,61.25 79.625,61.3 v1(79.625,62.25) 79.625,66.25 ; C62.2@81.325,87.25 81.325,86.325 v1(81.25,86.25) ; v1(83.5,60.125) 83.5,60.95 C51.2@83.55,61 84.8,62.25 ; v1(85.5,90.375) 85.5,89.45 C61.2@85.825,89.125 ; C53.2@86.675,60.625 86.75,60.7 v1(86.75,61.625) 86.125,62.25 84.8,62.25 ; v1(88.125,86.375) 87.2,86.375 C59.2@87.125,86.3 84.55,86.3 ; C55.2@88.75,69.8 88.7,69.75 v1(87.75,69.75) 86.25,69.75 ; C54.2@89.25,64.175 89.2,64.125 v1(88.125,64.125) 84.875,64.125 84.8,64.2 ; C56.2@89.25,72.8 89.2,72.75 v1(88.125,72.75) 86.75,72.75 86.25,72.25 86.25,69.75 ; v1(89.875,81) 88.925,81 C57.2@88.875,81.05 87.95,81.05 87.125,81.875 C58.2@87.125,82.675 87.075,82.625 v1(86.25,82.625) 83.75,85.125 83.75,85.5 ; v1(91.85,91.025) 91.15,91.025 89.25,89.125 C61.2@85.825,89.125 ; v1(64.375,88.25) 64.75,87.875 65.825,87.875 C60.2@67.075,86.625 ; C60.2@67.075,86.625 70,86.625 v1(71.25,87.875) ; C60.2@67.075,86.625 67.075,85.8 v1(67.125,85.75) ; v1(71.25,87.875) 71.25,86.375 73.25,84.375 77.5,84.375 78.575,85.45 ; 78.575,85.45 79.525,84.5 81.25,86.225 v1(81.25,86.25) ; 79.625,66.25 82.75,66.25 ; v1(81.25,86.25) 82,85.5 83.75,85.5 ; 82.75,66.25 86.25,69.75 ; 82.75,66.25 84.8,64.2 ; 83.75,85.5 84.55,86.3 ; 84.55,86.3 85.825,87.575 C61.2@85.825,89.125 ; 84.8,62.25 84.8,64.2
  Bottom Layer w0.5: v2(46.75,53.5) 55.5,53.5 ; 55.625,53.375 58.875,50.125 72.125,50.125 77.5,55.5 ; 64.5,64.625 64.625,64.75 69.375,69.5 69.75,69.875 69.75,70.125 ; v1(69.75,80.75) 69.75,80 69.75,70.125 ; 71.75,68.125 74.75,68.125 ; v2(91.875,48.875) 84.125,48.875 77.5,55.5 ; C10.1@105.5,42.625 112.125,42.625 120.625,51.125 P1.1@120.625,51.92 ; 69.75,70.125 75.75,70.125 77.75,68.125 74.75,68.125 ; 74.75,68.125 74.75,58.25 77.5,55.5
2.5V: C9.1 C68.2 C69.2 C70.2 C71.2 P1.3 R1.2 R18.2 R19.2 R20.2 U3.2 U4.3 U6.3 U6.58 U6.123 U6.178 | length 247.3
  Top Layer w0.3: C69.2@53.875,60.2 55.325,60.2 56.375,61.25 U6.58@58.15,61.25 ; C68.2@54.25,87.875 55.75,87.875 56.625,88.75 U6.3@58.15,88.75 ; v1(83.75,81.75) 83.75,85.625 86.875,88.75 U6.178@91.85,88.75 94,88.75 94.425,89.175 C71.2@94.75,89.175 ; U6.123@91.85,61.25 92.878,61.25 95,59.128 C70.2@95,57.95
  Top Layer w0.5: C69.2@53.875,60.2 53.45,60.2 52,58.75 52,52.375 v2(54.125,50.25) ; C68.2@54.25,87.875 53.625,87.875 53.25,88.25 53.25,96.75 v2(55.125,98.625) ; C71.2@94.75,89.175 97.575,89.175 v2(97.625,89.125) ; C70.2@95,57.95 95.05,58 v2(97.5,58) ; U4.3@101.525,47.8 103.325,47.8 104,47.125 C9.1@105.375,47.125 109.525,47.125 U3.2@113.025,43.625 U3.2@118.275,43.625 120.75,43.625 121.5,44.375 ; P1.3@120.625,54.46 122.415,54.46 123.25,53.625 123.25,46.125 121.5,44.375 ; R1.2@122.25,43 122.25,43.625 121.5,44.375
  Bottom Layer w0.3: R18.2@82.25,77.625 R19.2@82.25,78.875 R20.2@82.25,80.25 82.25,81.375 82.625,81.75 v1(83.75,81.75)
  Bottom Layer w0.5: v2(54.125,50.25) 59.375,45 95.25,45 97.5,47.25 ; v2(55.125,98.625) 92.125,98.625 97.625,93.125 v2(97.625,89.125) 97.625,58.125 v2(97.5,58) 97.5,47.25 ; C9.1@105.375,47.125 105.25,47.25 97.5,47.25
3.3V: C8.1 C11.2 C12.2 C13.2 C14.2 C19.2 C20.2 C21.2 C22.2 C23.2 C24.2 C25.2 C26.2 C27.2 C28.2 C29.2 C30.2 C31.2 C32.2 C33.2 C34.2 C35.2 C36.2 C37.2 C38.2 C39.2 C40.2 D1.2 D2.2 D3.2 D4.2 J2.4 J3.4 L1.2 P1.5 P2.1 P2.2 P2.39 P2.40 P3.1 P3.2 P3.39 P3.40 R4.1 R11.2 R13.2 R14.2 R25.1 R26.1 R27.1 U3.3 U5.2 U6.7 U6.15 U6.35 U6.47 U6.66 U6.77 U6.96 U6.104 U6.124 U6.136 U6.154 U6.170 U6.192 U6.206 U6.213 U6.225 U7.B4 U7.D1 U7.E4 U8.8 U9.1 U9.3 U9.9 U9.14 U9.27 U9.43 U9.49 Y1.4 | length 883.7
  Top Layer w0.2: 48.25,69.25 50,69.25
  Top Layer w0.3: v1(26.25,79.75) 27.075,79.75 D1.2@27.125,79.8 ; D3.2@27.125,73.925 27.125,71.625 28.25,70.5 J3.4@32.625,70.5 ; U7.D1@44.75,66.75 v1(43.25,66.75) 42.55,66.75 C12.2@41.875,67.425 41.8,67.5 41.5,67.5 40.875,68.125 40.875,70.75 42.125,72 ; Y1.4@45.9,75.975 45.725,75.8 43.275,75.8 C13.2@43.125,75.95 42.95,75.95 42.125,75.125 42.125,72 ; U8.8@47.025,85.78 47.025,86.275 v1(47.55,86.8) C14.2@47.55,88 ; v1(47.75,64.75) U7.E4@47.75,65.75 ; U7.B4@47.75,68.75 48.25,69.25 ; 50,69.25 52.875,72.125 R13.2@52.875,72.875 R13.2@52.875,73.125 ; v1(56.5,86.5) 56.75,86.75 U6.7@58.15,86.75 61.5,86.75 v1(61.875,87.125) ; U6.47@58.15,66.75 62,66.75 v1(62.375,67.125) ; U6.15@58.15,82.75 61.5,82.75 62.001,83.251 v1(62.001,83.376) ; v1(62.25,73.125) 61.875,72.75 U6.35@58.15,72.75 56.875,72.75 56.5,73.125 R13.2@52.875,73.125 ; U6.66@62.75,58.15 62.75,61.875 v1(63.125,62.25) ; U6.225@67.75,91.85 67.75,90.5 v1(68.125,90.125) ; v1(68,62.375) 68.25,62.125 U6.77@68.25,58.15 ; v1(73.75,87.625) U6.213@73.75,91.85 ; v1(76.75,63.5) 77.75,62.5 U6.96@77.75,58.15 ; v1(76.75,89.875) 77.25,90.375 U6.206@77.25,91.85 ; U6.104@81.75,58.15 81.75,60.25 82.125,60.625 v1(82.125,63.5) ; v1(83.125,88.25) 83.125,89.5 84.25,90.625 U6.192@84.25,91.85 ; v1(87.75,67) 89.375,67 90.125,67.75 U6.136@91.85,67.75 ; v1(88.25,76.5) 88.5,76.75 U6.154@91.85,76.75 ; v1(90.25,84.5) 90.5,84.75 U6.170@91.85,84.75 ; v1(90.375,61.5) 90.625,61.75 U6.124@91.85,61.75 ; U9.14@100.45,74.975 101.725,74.975 v1(101.75,75) ; U9.9@100.45,78.975 101.6,78.975 v1(101.625,79) ; U9.3@100.45,83.775 101.975,83.775 v1(102,83.75) ; U9.1@100.45,85.375 v1(100.45,87.575) ; R4.1@106,109.875 106,109 112.875,102.125 113,102.125 ; U9.43@111.75,76.575 114.125,76.575 C19.2@114.25,76.45 117.5,79.7 117.5,84.2 ; U9.49@111.75,81.375 114.075,81.375 C20.2@114.375,81.075 117.5,84.2 ; v2(113.75,92.875) 116,92.875 117.5,91.375 117.5,84.2 ; U5.2@121.5,106.875 123.375,105 123.375,102.75 123,102.375 123,97.875 R11.2@122.125,97 ; 42.125,72 42.25,72.125 48.75,72.125 51,74.375 52.25,74.375 52.875,73.75 R13.2@52.875,73.125
  Top Layer w0.5: J2.4@32.71,84.665 30.25,87.125 30.25,93.7 D4.2@30.8,94.25 30.8,99.785 P2.1@50.85,119.835 ; v1(39,87.25) 39.5,87.75 43.25,87.75 44.2,86.8 v1(47.55,86.8) ; v1(68.125,90.125) 68.5,89.75 v2(68.5,82.125) ; v2(96,48.875) 110.125,48.875 117,55.75 119.375,55.75 ; v1(99,64.5) 99.075,64.575 U9.27@100.45,64.575 ; P2.39@99.11,119.835 96.625,117.35 96.625,105.5 105.75,96.375 L1.2@111.125,96.375 113.75,93.75 v2(113.75,92.875) ; U3.3@118.275,45.925 119.375,47.025 119.375,55.75 ; P1.5@120.625,57 119.375,55.75
  Top Layer w1: P3.1@50.89,27.585 P3.2@50.89,30.125 ; P2.39@99.11,119.835 P2.40@99.11,122.375 ; L1.2@111.125,96.375 111.125,100.25 113,102.125 117.75,106.875 U5.2@121.5,106.875
  Bottom Layer w0.3: v1(26.25,79.75) 26.25,79 26.3,78.95 ; J3.4@32.375,70.5 32.506,70.5 J3.4@32.625,70.5 ; J2.4@32.71,84.665 33.92,85.875 37,85.875 37.375,86.25 R27.1@39,86.25 ; v1(43.25,66.75) 43.25,64.5 44.375,63.375 C11.2@47.675,63.375 47.75,63.45 v1(47.75,64.75) ; v1(47.55,86.8) 48.45,86.8 R14.2@49.5,85.75 ; 59.125,67.125 58,68.25 58,72.25 58.875,73.125 v1(62.25,73.125) 64.875,73.125 R25.1@68.125,76.375 ; C25.2@60.875,87.075 60.925,87.125 v1(61.875,87.125) 62.001,86.999 v1(62.001,83.376) 61.426,83.376 C26.2@61.25,83.2 ; C28.2@61.3,67.125 v1(62.375,67.125) ; C29.2@63.075,61.25 63.125,61.3 v1(63.125,62.25) ; v1(68.125,90.125) 68.125,89.875 68.575,89.425 C40.2@68.575,88.75 ; v1(73.75,87.625) 73.75,88.675 C39.2@73.825,88.75 ; C38.2@76.7,88.75 76.75,88.8 v1(76.75,89.875) ; v1(76.75,63.5) 76.75,62.55 C31.2@76.8,62.5 ; C32.2@82.125,62.55 v1(82.125,63.5) ; C37.2@83.075,89.25 83.125,89.2 v1(83.125,88.25) ; v1(88.25,76.5) 89.2,76.5 C35.2@89.25,76.55 ; C36.2@89.375,84.55 89.425,84.5 v1(90.25,84.5) ; C33.2@89.5,61.425 89.575,61.5 v1(90.375,61.5) ; v1(100.45,87.575) 100.875,88 102,88 ; v1(101.625,79) 101.625,79.125 102.175,79.675 C24.2@103,79.675 105.175,77.5 ; v1(101.75,75) 102.825,75 C23.2@103,75.175 105.175,73 ; v1(102,83.75) 102,88 ; C21.2@105.175,61.5 105.175,73 ; v2(113.75,92.875) 108.375,92.875 105.05,89.55 C22.2@105.05,88 ; 102,88 C22.2@105.05,88 ; C22.2@105.05,88 105.175,87.875 105.175,77.5 ; 105.175,73 105.175,77.5
  Bottom Layer w0.5: 26.25,79 26.25,76.756 J3.4@32.506,70.5 ; 26.3,78.95 D2.2@27.375,78.95 28.95,78.95 30.125,80.125 30.125,82.08 J2.4@32.71,84.665 ; J3.4@32.375,70.5 29.5,67.625 29.5,60.875 32.25,58.125 41.25,58.125 42.875,56.5 ; R27.1@39,86.25 v1(39,87.25) ; P3.2@50.89,30.125 48.125,32.89 ; v1(56.5,86.5) 56.75,86.75 56.75,92.625 57.5,93.375 68.25,93.375 ; C28.2@61.3,67.125 59.125,67.125 58.125,66.125 58.125,63.875 53.875,59.625 ; C29.2@63.075,61.25 63.075,59.825 62.125,58.875 56.125,58.875 ; R26.1@65.5,81.125 67.5,81.125 v2(68.5,82.125) ; v1(68,62.375) 68,57.875 64.5,54.375 57.625,54.375 56.125,55.875 56.125,58.875 ; v1(68.125,90.125) 68.25,90.25 68.25,93.375 ; C39.2@73.825,88.75 73.825,91.2 76,93.375 ; v1(76.75,89.875) 76.75,93.375 ; C31.2@76.8,62.5 76.8,60.7 79.5,58 82.125,58 ; C32.2@82.125,62.55 82.125,58 ; C37.2@83.075,89.25 83.075,91.7 84.75,93.375 ; v1(87.75,67) 91.25,67 91.875,66.375 ; C35.2@89.25,76.55 91.675,76.55 91.875,76.75 ; v1(90.25,84.5) 91.875,84.5 ; v2(96,48.875) 96,58.375 94.563,59.812 89.937,59.812 ; v1(99,64.5) 102,61.5 C21.2@105.175,61.5 ; P3.39@99.15,27.585 P3.40@99.15,30.125 ; U5.2@121.5,106.875 123.375,105 123.375,103 121.625,101.25 C8.1@121.625,67.125 122.25,66.5 122.25,58.625 P1.5@120.625,57 123,54.625 123,48.25 104.875,30.125 P3.40@99.15,30.125 ; 42.875,56.5 50.75,56.5 53.875,59.625 ; 42.875,56.5 42.875,38.14 48.125,32.89 ; 48.125,32.89 96.385,32.89 P3.40@99.15,30.125 ; 53.875,59.625 54.625,58.875 56.125,58.875 ; 68.25,93.375 76,93.375 ; 76,93.375 84.75,93.375 ; 82.125,58 88.125,58 89.937,59.812 ; 84.75,93.375 91.625,93.375 93.25,91.75 93.25,89.625 91.875,88.25 91.875,84.5 ; 89.937,59.812 90.375,60.25 v1(90.375,61.5) 91.875,63 91.875,66.375 ; 91.875,66.375 91.875,76.75 ; 91.875,76.75 91.875,84.5
  Bottom Layer w1: P2.1@50.85,119.835 P2.2@50.85,122.375
ASDO: C17.1 D3.3 J2.9 U6.12 U8.5 | length 43.8
  Top Layer w0.3: D3.3@29.125,74.875 33.08,74.875 J2.9@35.25,77.045 38.705,77.045 v1(38.875,76.875) ; U8.5@47.025,81.97 48.655,81.97 v1(48.75,81.875) ; v1(55.625,84.875) 56.25,84.25 U6.12@58.15,84.25
  Bottom Layer w0.3: 39.17,77.045 42.625,80.5 42.625,85.5 44,86.875 44.75,86.125 44.75,83.125 46,81.875 v1(48.75,81.875) 51.75,84.875 v1(55.625,84.875)
CLK_48M: U6.31 Y1.3 | length 10.6
  Top Layer w0.3: Y1.3@48.1,75.975 51.9,75.975 53.125,74.75 U6.31@58.15,74.75
CONF_DONE: J2.3 R27.2 U6.153 | length 63.1
  Top Layer w0.2: v1(59.875,83.75) 61,83.75 61.348,84.098 62.75,84.098 63.723,83.125 v1(64.75,83.125)
  Top Layer w0.3: v1(86.625,76.25) 87.125,75.75 89.5,75.75 90,76.25 U6.153@91.85,76.25
  Bottom Layer w0.2: 58.625,84.75 59.125,84.25 59.375,84.25 v1(59.875,83.75) ; v1@64.75,83.027 70.598,83.027 70.625,83
  Bottom Layer w0.3: J2.3@35.25,84.665 39.915,84.665 42.75,87.5 54.125,87.5 56.875,84.75 58.625,84.75 ; 70.625,83 77.375,76.25 v1(86.625,76.25)
DATA0: C15.1 D1.3 J2.7 R15.2 U6.24 | length 37.7
  Top Layer w0.3: D1.3@29.125,80.75 29.125,79.375 30.125,78.375 34.04,78.375 J2.7@35.25,79.585 37.415,79.585 39.375,77.625 42.125,77.625 42.625,78.125 R15.2@42.625,78.625 44,80 50.75,80 52.452,78.298 54.314,78.298 54.362,78.25 U6.24@58.15,78.25
  Top Layer w0.5: C15.1@27.825,83.75 29.125,82.45 D1.3@29.125,80.75
DCLK: C18.1 D4.3 J2.1 U6.23 U8.6 | length 45.2
  Top Layer w0.3: D4.3@31.75,92.25 35.25,88.75 J2.1@35.25,87.205 37.545,89.5 47.5,89.5 48.76,88.24 48.76,85.99 51.875,82.875 51.875,80.125 ; U8.6@47.025,83.24 48.76,83.24 v1(50.317,81.683) 51.875,80.125 ; U6.23@58.15,78.75 53.25,78.75 51.875,80.125
  Bottom Layer w0.3: v1@50.325,81.675 C18.1@51.625,81.675
  Bottom Layer w0.5: v1(50.317,81.683) v1@50.325,81.675
FLASH_DQ1: R15.1 U8.2 | length 9.2
  Top Layer w0.3: R15.1@41.125,78.625 39.375,80.375 39.375,84.125 39.76,84.51 U8.2@42.225,84.51
FPGA_TCK: R17.2 U6.27 | length 3
  Top Layer w0.3: R17.2@55.375,76.125 56,76.125 56.625,76.75 U6.27@58.15,76.75